# EAGLE board Jar_of_Fireflies (EAGLE 6.0)
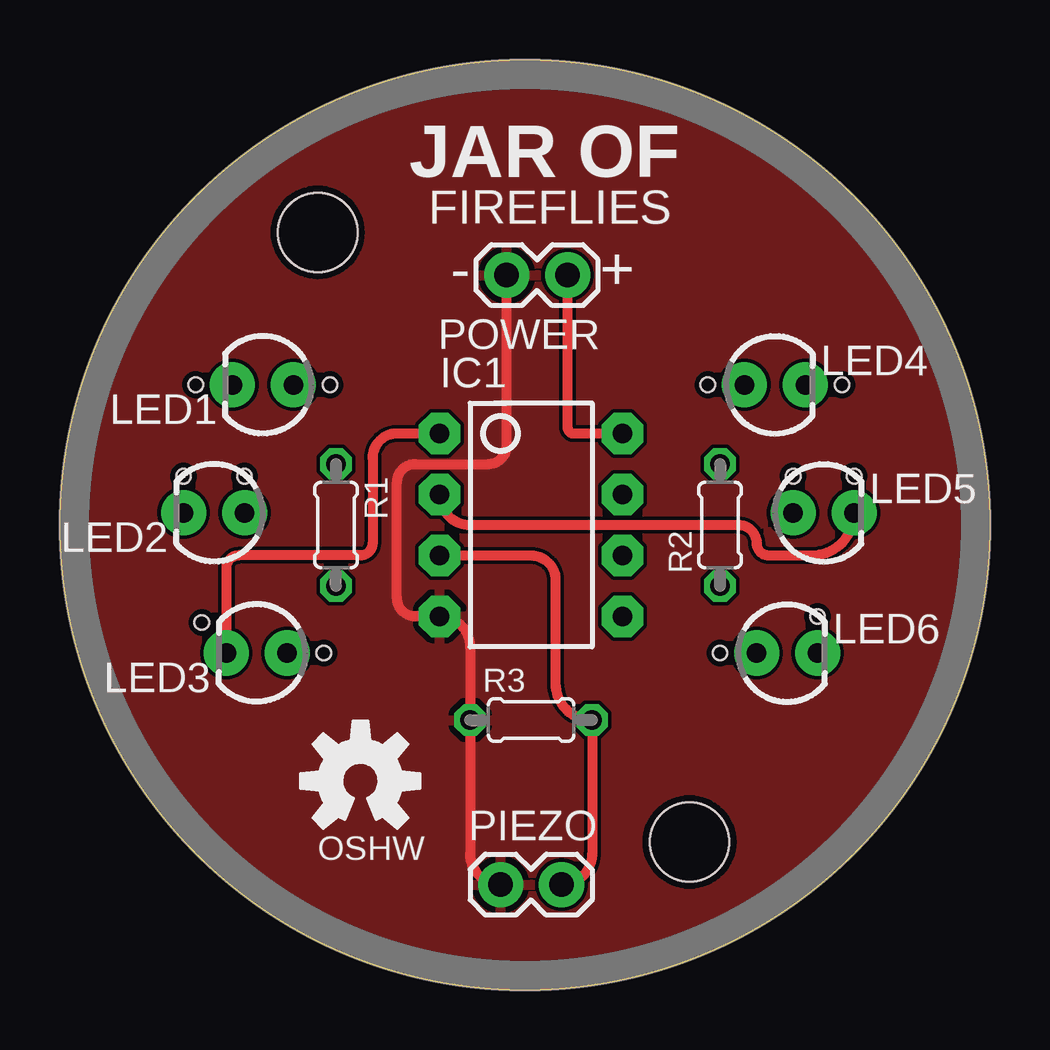
[diagram p0: board, top side]
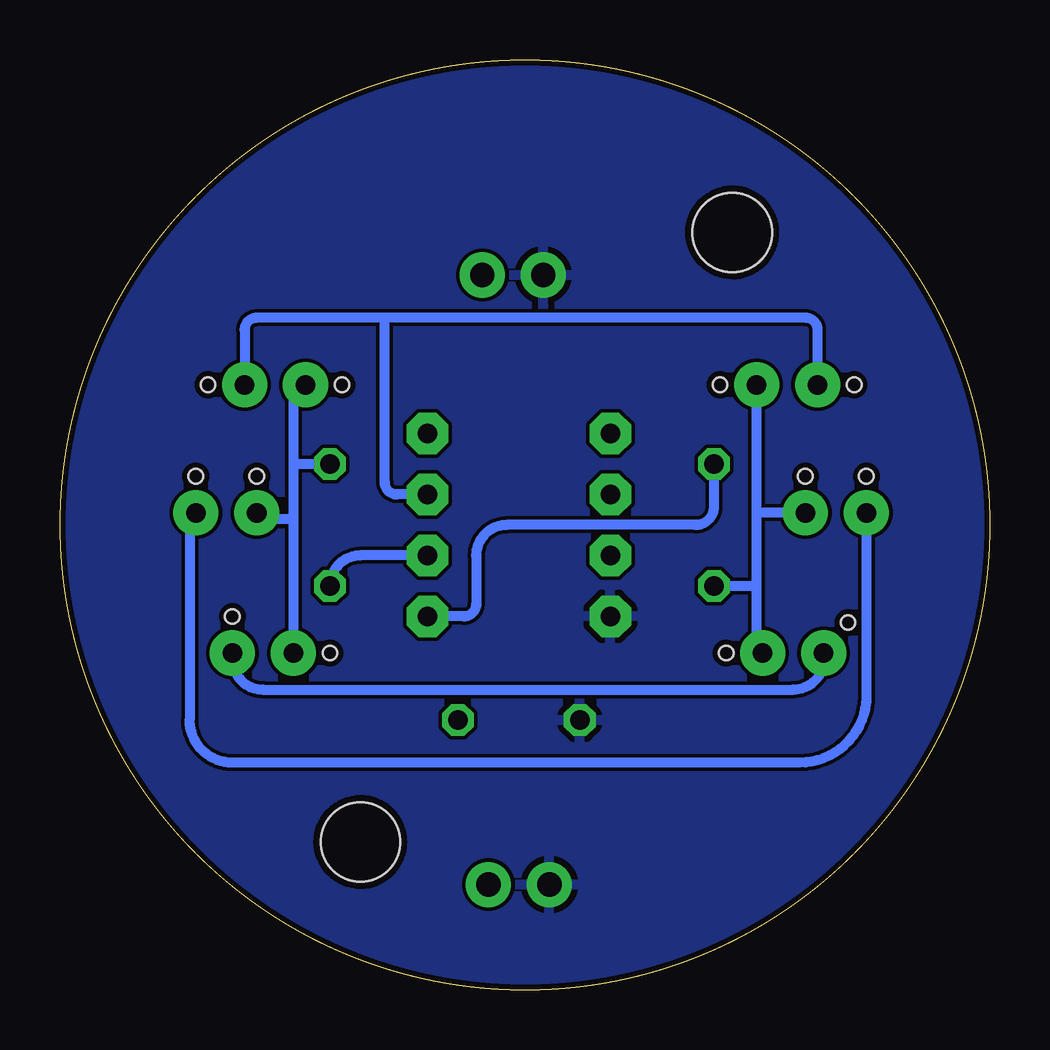
[diagram p1: board, bottom side, seen from below]

Size 38.75 x 38.75 mm. Coordinates in mm from the lower left corner, seen from the top.
Outline: circle at 19.37,19.37 radius 19.37
Copper layers (1*16): Top 0.035mm / dielectric 1.5mm / Bottom 0.035mm
Design rules: minimum track width 6mil, minimum drill 12mil, track to track 6mil, track to pad 6mil, pad to pad 6mil, via to via 6mil, smd to smd 0mil, copper to edge 10mil, drill to drill 10mil, minimum pad ring 10mil, minimum via ring 6mil, stop-mask expansion 2mil, vias tented up to drill 100mil, thermal gap 10mil
Holes 0.6 mm at 5.66,25.22 11.25,25.22 5.15,21.41 7.69,21.41 5.91,15.31 10.99,14.04 27.5,14.04 31.57,15.56 30.55,21.41 33.09,21.41 26.99,25.22 32.58,25.22

## Footprints (pad centres in the part's own frame; a part is rotated, then mirrored left to right if it is on the bottom)
DIP08 = drill 0.813 pad 1.727 octagon: 1 -3.81,-3.81; 2 -1.27,-3.81; 3 1.27,-3.81; 4 3.81,-3.81; 5 3.81,3.81; 6 1.27,3.81; 7 -1.27,3.81; 8 -3.81,3.81
STAND-OFF = hole 3.302: 0,0
LED3MM = drill 0.813 pad 1.88: A -1.27,0; K 1.27,0
1X02 = drill 1.016 pad 1.88: 1 0,0; 2 2.54,0
0204/5 = drill 0.813 octagon: 1 -2.54,0; 2 2.54,0

## Placement (x,y rotation side)
IC1  ATTINY85  [DIP08]  19.63,19.37 270 top
JP1  STAND-OFF  [STAND-OFF]  26.23,6.17 0 top
JP2  STAND-OFF  [STAND-OFF]  10.74,31.57 0 top
LED1  [LED3MM]  8.45,25.22 180 top
LED2  [LED3MM]  6.42,19.88 180 top
LED3  [LED3MM]  8.2,14.04 180 top
LED4  [LED3MM]  29.79,25.22 0 top
LED5  [LED3MM]  31.82,19.88 0 top
LED6  [LED3MM]  30.3,14.04 0 top
PIEZO  [1X02]  18.36,4.39 0 top
POWER  [1X02]  21.15,29.79 180 top
R1  [0204/5]  11.5,19.37 270 top
R2  [0204/5]  27.5,19.37 90 top
R3  [0204/5]  19.63,11.25 0 top
U$3  [OSHW-LOGO-M]  12.52,8.71 0 top

## Library data of the parts
IC1 JP1 JP2 LED1-LED6 PIEZO POWER U$3 = SparkFun
R1-R3 = resistor

## Nets
1+: IC1.5 R1.1
1-: IC1.7 LED1.K LED4.K
2+: IC1.6 R2.1
2-: IC1.2 LED2.K LED5.K
3-: IC1.1 LED3.K LED6.K
GND: IC1.4 PIEZO.1 POWER.2 R3.1
N$1: LED1.A LED2.A LED3.A R1.2
N$2: LED4.A LED5.A LED6.A R2.2
PIEZO: IC1.3 PIEZO.2 R3.2
VCC: IC1.8 POWER.1

## Tracks (layer width: path | path; a pad name or v marks a point on that pad's centre or on a via)
1+
  Bottom 0.406: R1.1 11.5,20.14 arc90 12.26,19.37 20.14,19.37 arc-90 21.41,18.1 21.41,16.07 arc90 21.91,15.56 IC1.5
1-
  Bottom 0.406: LED1.K 7.18,27.5 arc-90 7.69,28.01 25.22,28.01 | 25.22,28.01 30.55,28.01 arc-90 31.06,27.5 LED4.K | IC1.7 24.71,20.64 arc90 25.22,21.15 25.22,28.01
2+
  Bottom 0.406: IC1.6 26.23,18.1 arc-90 R2.1
2-
  Top 0.406: IC1.2 arc90 17.09,19.37 28.26,19.37 arc-90 29.03,18.61 arc90 29.53,18.1 31.31,18.1 arc90 LED5.K
  Bottom 0.406: LED2.K 5.15,12.26 arc90 7.94,9.47 31.57,9.47 arc90 33.34,11.25 33.34,19.88 arc90 LED5.K
3-
  Top 0.406: IC1.1 14.04,23.18 arc90 13.02,22.17 13.02,18.61 arc-90 12.52,18.1 7.44,18.1 arc90 6.93,17.6 LED3.K
  Bottom 0.406: LED6.K 31.57,13.79 arc-90 30.3,12.52 8.2,12.52 arc-100 LED3.K
GND
  Top 0.406: PIEZO.1 arc-90 17.09,5.66 R3.1 17.09,14.29 arc90 IC1.4 14.8,15.56 arc-90 14.04,16.33 14.04,21.15 arc-90 14.8,21.91 17.85,21.91 arc90 18.61,22.68 POWER.2
  pour Top: -0.18,-0.18 39.19,-0.18 39.19,38.93 -0.69,38.93
  pour Bottom: -0.18,-0.18 39.19,-0.18 39.19,38.93 -0.69,38.93
N$1
  Bottom 0.406: LED3.A 9.72,14.04 9.72,16.83 | 9.72,16.83 9.72,19.88 | 9.72,19.88 LED1.A | LED2.A 9.72,19.88 | R1.2 9.72,16.83
N$2
  Bottom 0.406: LED4.A arc-90 29.03,24.71 29.03,21.91 | 29.03,21.91 29.03,19.63 | 29.03,19.63 LED6.A | LED5.A arc-90 30.3,19.63 29.03,19.63 | R2.2 29.03,21.91
PIEZO
  Top 0.406: PIEZO.2 arc90 22.17,5.66 R3.2 arc-90 20.64,12.77 20.64,17.09 arc90 19.63,18.1 IC1.3
VCC
  Top 0.406: IC1.8 21.41,23.18 arc-90 21.15,23.44 POWER.1

## Text on the board
tPlace: JAR OF | FIREFLIES | - | + | OSHW